# Altium PCB QR_Scanning_V1_STM32.PcbDoc (part 1 of 2)
Units mm, origin at the board's own origin, x right, y up, seen from the top; angles counter-clockwise.
Board outline 129.98 x 102.14 mm, 2 copper layers (Top Layer, Bottom Layer); 184 components, 126 nets, 555 pads, 211 vias.
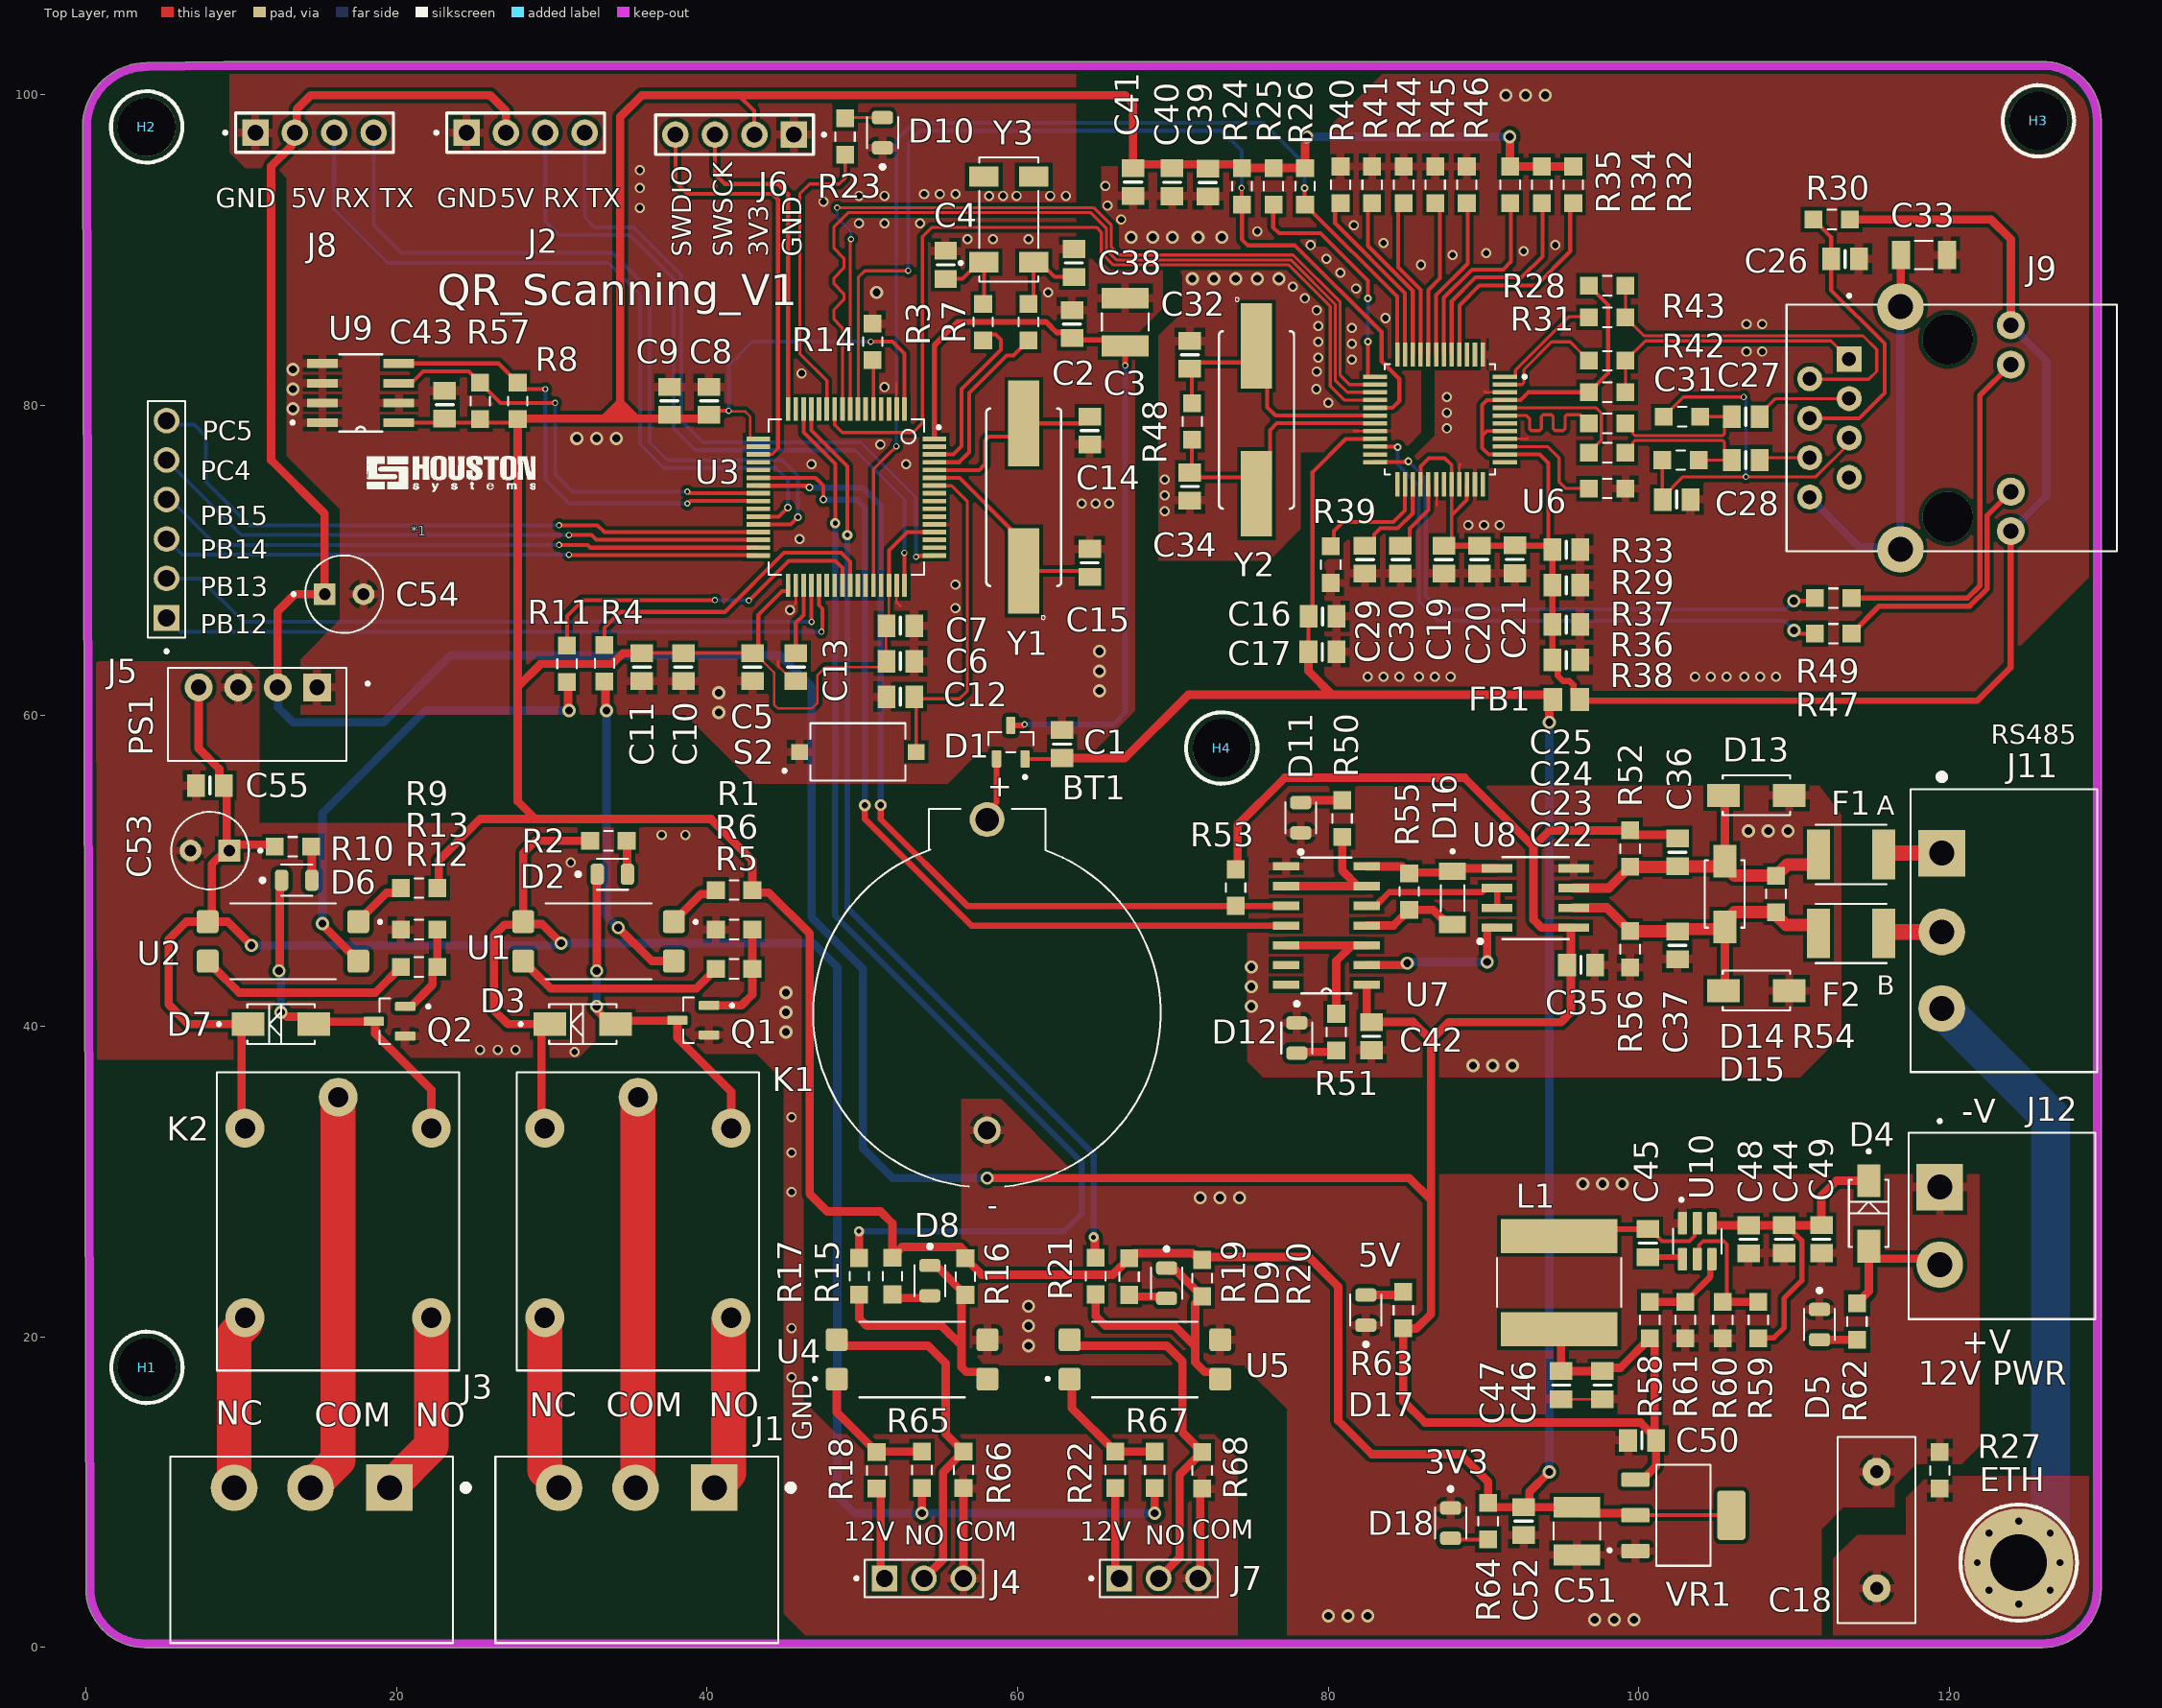
[diagram p0: Top Layer view]
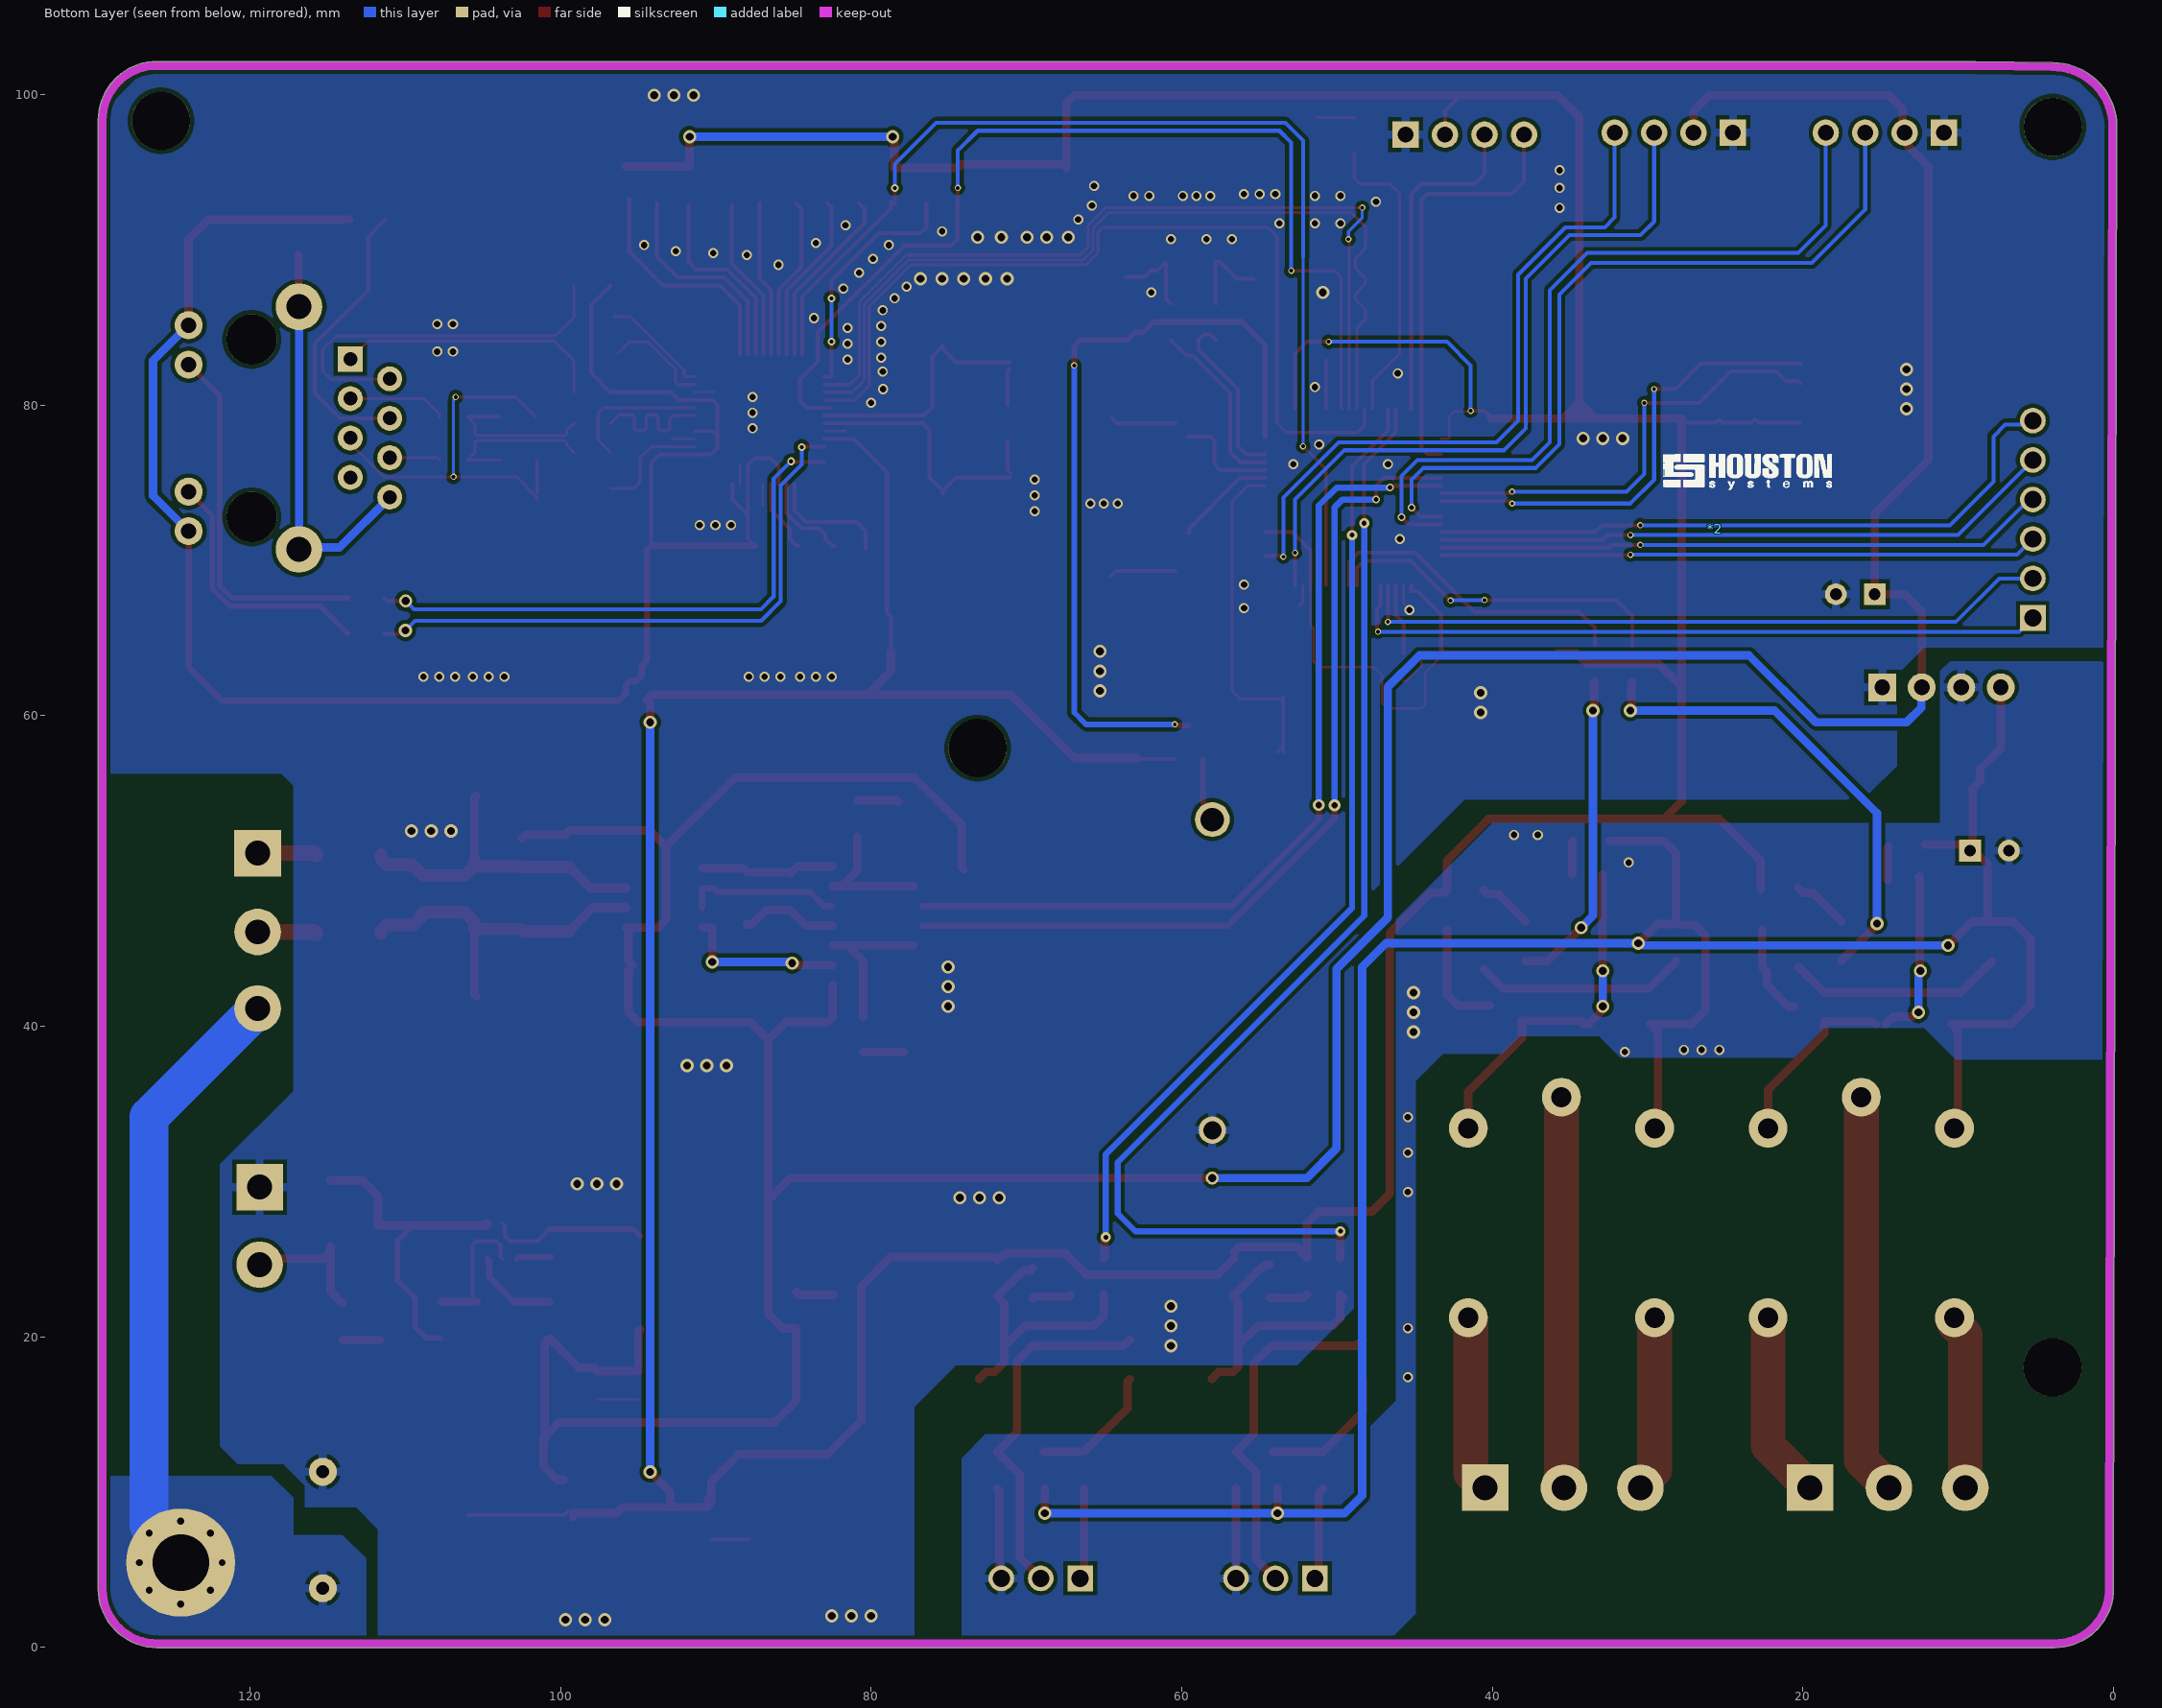
[diagram p1: Bottom Layer view, seen from below]
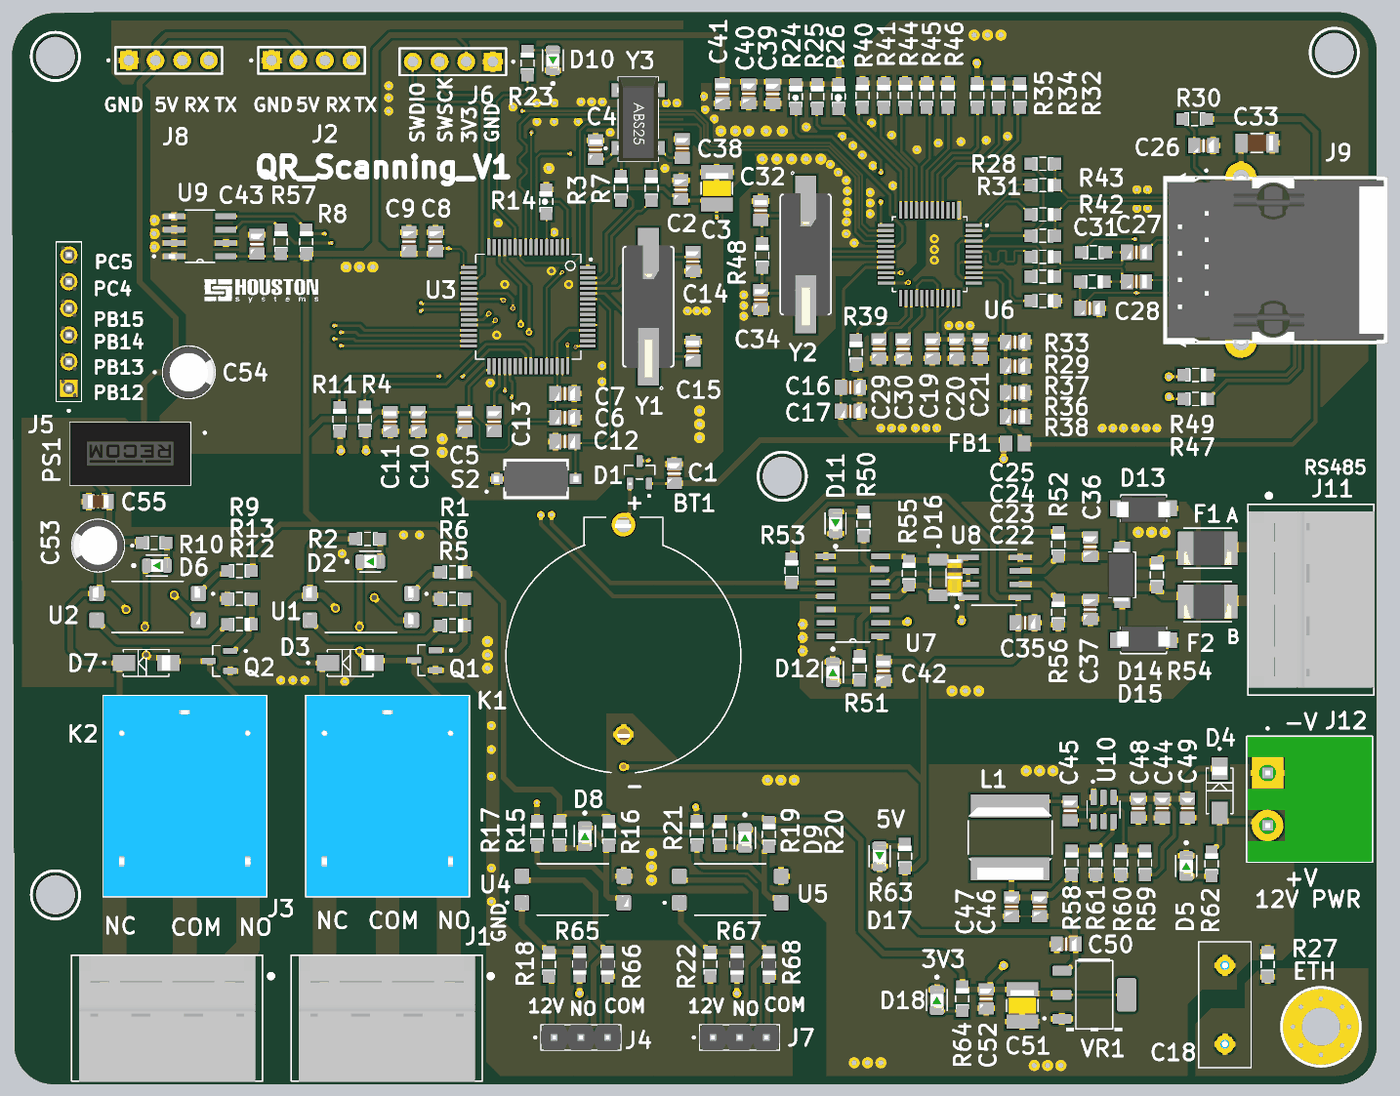
[diagram p3: 3D render of the assembled board from above, using the file's embedded part models]

## Layer stack, top to bottom
Top Solder: solder mask 0.0102, Solder Resist, Dk 3.5
Top Layer: signal copper 0.0356
Dielectric 1: dielectric 0.32, FR-4, Dk 4.8
Bottom Layer: signal copper 0.0356
Bottom Solder: solder mask 0.0102, Solder Resist, Dk 3.5

## Board outline
125.998,-0.016 ccw(c125.984,3.775) 129.776,3.775 129.776,98.333 ccw(c125.984,98.333) 125.984,102.124 125.982,102.124 8.89,102.124 8.885,102.124 3.926,102.041 ccw(c3.928,97.909) -0.203,97.909 0.018,5.299 0.018,3.776 ccw(c3.81,3.776) 3.81,-0.016

## Design rules (kind name [scope] priority, off if disabled: settings)
Clearance Clearance_1 [All] p1: gap=0.254 ignorepadtopadclearanceinfootprint=FALSE except(0.125: Arc-Arc Arc-Track Arc-SMDPad Track-Track Track-SMDPad; 0.154: SMDPad-SMDPad)
DiffPairsRouting [All] p1: maxlimit=0.127 minlimit=0.127 mostfreqgap=0.127 toplayer_minwidth=0.197 toplayer_maxwidth=0.197 toplayer_prefwidth=0.197 bottomlayer_minwidth=0.197 bottomlayer_maxwidth=0.197 bottomlayer_prefwidth=0.197 impedanceprofiledriven=TRUE impedanceprofileid={E7BAE55F-32ED-4D8B-B3F7-4CC335C5E980} impedanceprofilevalue=100.000000 maxuncoupledlength=12.7
HoleSize [All] p1: absolutevalues=TRUE maxlimit=5.54 minlimit=0.025 maxpercent=80.000 minpercent=20.000
HoleToHoleClearance [All] p1: gap=0.025 allowstackedmicrovias=TRUE
MinimumSolderMaskSliver [All] p1: minsoldermaskwidth=0.002
PlaneConnect [All] p1: planeconnectstyle=Relief reliefexpansion=0.508 reliefentries=4 reliefconductorwidth=0.54 reliefairgap=0.254
PolygonConnect [All] p1: connectstyle=Relief reliefconductorwidth=0.54 reliefentries=4 polygonreliefangle="90 Angle" airgapwidth=0.254
RoutingVias [All] p1: holewidth=0.411 width=0.7 viastyle="Through Hole" minholewidth=0.111 minwidth=0.15 maxholewidth=0.511 maxwidth=0.85
SilkToSilkClearance [All] p1: silktosilkclearance=0.1
SilkToSolderMaskClearance [IsPad] p1: minsilkscreentomaskgap=-0.5 clearancetoexposedcopper=TRUE
SolderMaskExpansion [All] p1: expansion=0.102 istentingtop=FALSE
SupplyNets "Schematic Supply Nets_9" [InNet('5VDC')] p1: voltage=0.000
SupplyNets "Schematic Supply Nets_3" [InNet('ERTH')] p2: voltage=0.000
SupplyNets "Schematic Supply Nets_8" [InNet('12VCC')] p3: voltage=0.000
SupplyNets "Schematic Supply Nets_7" [InNet('+12')] p4: voltage=0.000
SupplyNets "Schematic Supply Nets_6" [InNet('3V3')] p5: voltage=0.000
SupplyNets "Schematic Supply Nets_5" [InNet('SGND')] p6: voltage=0.000
SupplyNets "Schematic Supply Nets_4" [InNet('GND_ERTH')] p7: voltage=0.000
SupplyNets "Schematic Supply Nets_2" [InNet('AVDD')] p8: voltage=0.000
SupplyNets "Schematic Supply Nets_1" [InNet('GND')] p9: voltage=0.000
SupplyNets "Schematic Supply Nets" [InNet('+5')] p10: voltage=0.000
Width Width_1 [All] p1: maxlimit=2.5 minlimit=0.154 preferedwidth=0.54
Width [InNetClass('All Nets')] p2: maxlimit=0.535 minlimit=0.535 preferedwidth=0.535 impedanceprofiledriven=TRUE impedanceprofileid={4CF58DFD-B6A9-4837-9F42-7D02EB7506FA} impedanceprofilevalue=50.000000 minimp=50.000000 maximp=50.000000 favimp=50.000000
23 further rules are at their usual default settings.

## Classes and differential pairs
component class QR_Scanning2_V1_STM32: C44 C45 C46 C47 C48 C49 C50 C51 C52 C53 C54 C55 D4 D5 D17 D18 J12 L1 PS1 R58 R59 R60 R61 R62 R63 R64 U10 VR1
differential pair class DIFF_100: RJ45 RX TX
net class "Single_50 ohm": INT MISO MOSI OSC_IN OSC_OUT RST SCS SWO/sck1 XI XO
component class QR_Scanning_V1_STM32: BT1 C1 C2 C3 C4 C5 C6 C7 C8 C9 C10 C11 C12 C13 C14 C15 C38 C43 D1 D2 D3 D6 D7 D8 D9 D10 J1 J2 J3 J4 J5 J6 J7 J8 K1 K2 Q1 Q2 R1 R2 R3 R4 R5 R6 R7 R8 R9 R10 R11 R12 R13 R14 R15 R16 R17 R18 R19 R20 R21 R22 R23 R57 R65 R66 R67 R68 S2 U1 U2 U3 U4 U5 U9 Y1 Y3
component class QR_Scanning1_V1_STM32: *1 C16 C17 C18 C19 C20 C21 C22 C23 C24 C25 C26 C27 C28 C29 C30 C31 C32 C33 C34 C35 C36 C37 C39 C40 C41 C42 D11 D12 D13 D14 D15 D16 E ETH F1 F2 FB1 H1 H2 H3 H4 J9 J11 R24 R25 R26 R27 R28 R29 R30 R31 R32 R33 R34 R35 R36 R37 R38 R39 R40 R41 R42 R43 R44 R45 R46 R47 R48 R49 R50 R51 R52 R53 R54 R55 R56 U6 U7 U8 Y2
differential pair TX: +TX_P -TX_N
differential pair RX: +RX_P -RX_N
differential pair RJ45: +RJ45_P -RJ45_N

## Components (designator, comment, footprint, x,y, rotation, side; value= is the part's Value field where it differs from the comment)
*1 "HOUSTON_LOGO" HOUSTON_LOGO 21.463,71.882 r0 top
*2 "HOUSTON_LOGO" HOUSTON_LOGO 25.654,72.009 r180 bottom (schematic designator *1)
BT1 "Battery Holder (Open) Coin" "Battery Holder (Open) Coin" 58.039,43.307 r90 top
C1 "CAP 0.1uF 50V 0805" "CAP CER 0.1uF/50V 5%" 62.865,58.166 r270 top
C2 "CAP 0.1uF 50V 0805" "CAP CER 0.1uF/50V 5%" 63.5,85.217 r270 top
C3 "TANT CAP 10uF/16V 5% 3528(B)" "TANT CAP 3528(B)" 66.929,85.344 r90 top
C4 "CAP 4.3pF 50V 0805" "CAP CER 0.1uF/50V 5%" 55.372,89.027 r90 top
C5 "CAP 0.1uF 50V 0805" "CAP CER 0.1uF/50V 5%" 42.926,63.13 r90 top
C6 "CAP 0.1uF 50V 0805" "CAP CER 0.1uF/50V 5%" 52.451,63.5 r180 top
C7 "CAP 0.1uF 50V 0805" "CAP CER 0.1uF/50V 5%" 52.451,65.786 r180 top
C8 "CAP 0.1uF 50V 0805" "CAP CER 0.1uF/50V 5%" 40.132,80.264 r270 top
C9 "CAP 0.1uF 50V 0805" "CAP CER 0.1uF/50V 5%" 37.592,80.264 r270 top
C10 "CAP 0.1uF 50V 0805" "CAP CER 0.1uF/50V 5%" 38.481,63.119 r90 top
C11 "CAP 4.7uF 50V 0805" "CAP CER 0.1uF/50V 5%" 35.814,63.119 r90 top
C12 "CAP 0.1uF 50V 0805" "CAP CER 0.1uF/50V 5%" 52.451,61.214 r0 top
C13 "CAP 4.7uF 50V 0805" "CAP CER 0.1uF/50V 5%" 45.72,63.119 r90 top
C14 "CAP 20pF 50V 0805" "CAP CER 0.1uF/50V 5%" 64.643,78.359 r270 top
C15 "CAP 20pF 50V 0805" "CAP CER 0.1uF/50V 5%" 64.643,69.839 r90 top
C16 "CAP 0.1uF 50V 0805" "CAP CER 0.1uF/50V 5%" 79.643,66.396 r180 top
C17 "CAP 10uF 50V 0805" "CAP CER 0.1uF/50V 5%" 79.629,64.11 r180 top
C18 "Ceramic capacitor 3300pF4KV" "Ceramic capacitor 3300pF4KV" 115.316,7.56 r270 top
C19 "CAP 0.1uF 50V 0805" "CAP CER 0.1uF/50V 5%" 87.452,70.042 r90 top
C20 "CAP 0.1uF 50V 0805" "CAP CER 0.1uF/50V 5%" 89.738,70.042 r90 top
C21 "CAP 0.1uF 50V 0805" "CAP CER 0.1uF/50V 5%" 92.024,70.064 r90 top
C22 "CAP 0.1uF 50V 0805" "CAP CER 0.1uF/50V 5%" 95.326,63.576 r180 top
C23 "CAP 0.1uF 50V 0805" "CAP CER 0.1uF/50V 5%" 95.326,65.862 r180 top
C24 "CAP 0.1uF 50V 0805" "CAP CER 0.1uF/50V 5%" 95.326,68.402 r180 top
C25 "CAP 10uF 50V 0805" "CAP CER 0.1uF/50V 5%" 95.326,70.688 r180 top
C26 "CAP 22nF 50V 0805" "CAP CER 0.1uF/50V 5%" 113.284,89.408 r180 top
C27 "CAP 6.8nF 50V 0805" "CAP CER 0.1uF/50V 5%" 106.894,79.248 r180 top
C28 "CAP 6.8nF 50V 0805" "CAP CER 0.1uF/50V 5%" 106.894,76.454 r180 top
C29 "CAP 10nF 50V 0805" "CAP CER 0.1uF/50V 5%" 82.372,70.042 r90 top
C30 "CAP 4.7uF 50V 0805" "CAP CER 0.1uF/50V 5%" 84.658,70.042 r90 top
C31 "CAP 10nF 50V 0805" "CAP CER 0.1uF/50V 5%" 102.438,73.914 r180 top
C32 "CAP 18pF 50V 0805" "CAP CER 0.1uF/50V 5%" 71.095,83.236 r90 top
C33 "CAP CER 1nF/2KV 1206 5%" "CAP CER 1nF/2KV 1206 5%" 118.364,89.662 r180 top
C34 "CAP 18pF 50V 0805" "CAP CER 0.1uF/50V 5%" 71.095,74.752 r270 top
C35 "CAP 0.1uF 50V 0805" "CAP CER 0.1uF/50V 5%" 96.277,43.942 r0 top
C36 "CAP 1nF 50V 0805" "CAP CER 0.1uF/50V 5%" 102.489,51.192 r90 top
C37 "CAP 1nF 50V 0805" "CAP CER 0.1uF/50V 5%" 102.489,45.212 r270 top
C38 "CAP 4.3pF 50V 0805" "CAP CER 0.1uF/50V 5%" 63.627,89.143 r90 top
C39 "CAP 0.1uF 50V 0805" "CAP CER 0.1uF/50V 5%" 72.253,94.328 r90 top
C40 "CAP 0.1uF 50V 0805" "CAP CER 0.1uF/50V 5%" 69.952,94.347 r90 top
C41 "CAP 0.1uF 50V 0805" "CAP CER 0.1uF/50V 5%" 67.437,94.361 r90 top
C42 "CAP 0.1uF 50V 0805" "CAP CER 0.1uF/50V 5%" 82.779,39.356 r90 top
C43 "CAP 0.1uF 50V 0805" "CAP CER 0.1uF/50V 5%" 23.114,80.021 r270 top
C44 "CAP 10uF 50V 0805" "CAP CER 0.1uF/50V 5%" 109.347,26.289 r90 top
C45 "CAP 0.1uF 50V 0805" "CAP CER 0.1uF/50V 5%" 100.584,26.035 r90 top
C46 "CAP 22uF 50V 0805" "CAP CER 0.1uF/50V 5%" 97.663,16.891 r90 top
C47 "CAP 22uF 50V 0805" "CAP CER 0.1uF/50V 5%" 94.996,16.891 r90 top
C48 "CAP 0.1uF 50V 0805" "CAP CER 0.1uF/50V 5%" 107.061,26.278 r90 top
C49 "CAP 10uF 50V 0805" "CAP CER 0.1uF/50V 5%" 111.76,26.289 r90 top
C50 "CAP 10uF 50V 0805" "CAP CER 0.1uF/50V 5%" 100.203,13.335 r0 top
C51 "TANT CAP 10uF/16V 5% 3528(B)" "TANT CAP 3528(B)" 96.012,7.493 r270 top
C52 "CAP 0.1uF 50V 0805" "CAP CER 0.1uF/50V 5%" 92.583,8.128 r90 top
C53 "CAP ELE 10µF 25V TH" "CAP ELE 10µF 25V TH" 8.001,51.308 r180 top
C54 "CAP ELE 10µF 25V TH" "CAP ELE 10µF 25V TH" 16.637,67.818 r0 top
C55 "CAP 0.1uF 50V 0805" "CAP CER 0.1uF/50V 5%" 8.001,55.499 r0 top
D1 "Schottky Diode SOT23" "Schottky Diode SOT23 BAT54C" 59.563,58.293 r90 top
D2 "LED-0805" LED-0805 33.909,49.784 r0 top
D3 "DIODE M7 DO-214AC" "DIODE M7 DO-214AC" 32.004,40.132 r0 top
D4 "DIODE M7 DO-214AC" "DIODE M7 DO-214AC" 114.808,27.94 r270 top
D5 "LED-0805" LED-0805 111.633,20.787 r270 top
D6 "LED-0805" LED-0805 13.589,49.403 r0 top
D7 "DIODE M7 DO-214AC" "DIODE M7 DO-214AC" 12.573,40.132 r0 top
D8 "LED-0805" LED-0805 54.356,23.622 r270 top
D9 "LED-0805" LED-0805 69.596,23.454 r270 top
D10 "LED-0805" LED-0805 51.308,97.536 r90 top
D11 "LED-0805" LED-0805 78.232,53.426 r90 top
D12 "LED-0805" LED-0805 77.978,39.243 r270 top
D13 "TVS SMAJ6.0CA BiD" "TVS SMAJ6.0CA DO-214AC (SMA)" 107.569,54.864 r0 top
D14 "TVS SMAJ6.0CA BiD" "TVS SMAJ6.0CA DO-214AC (SMA)" 105.537,48.514 r90 top
D15 "TVS SMAJ6.0CA BiD" "TVS SMAJ6.0CA DO-214AC (SMA)" 107.569,42.291 r180 top
D16 "DIODE-1N4148W-SOD-80" DIODE-1N4148W-SOD-80 88.011,48.26 r270 top
D17 "LED-0805" LED-0805 82.423,21.717 r90 top
D18 "LED-0805" LED-0805 87.884,8.001 r270 top
ETH "EARTHING_VIA HOLE_3.65MM" "EARTHING_VIA HOLE_3.65MM" 124.46,5.461 r90 top (schematic designator "EARTHING_VIA HOLE_3.65MM")
F1 "FUSE 1812" "FUSE 1812" 113.665,51.054 r0 top
F2 "FUSE 1812" "FUSE 1812" 113.665,45.974 r0 top
FB1 "FB 0805" "FB 0805" 95.326,61.036 r0 top
H1 "ScrewHole_3.75mmD" "ScrewHole_3.75mmD - duplicate" 3.937,18.034 r180 top
H2 "ScrewHole_3.75mmD" "ScrewHole_3.75mmD - duplicate" 3.928,97.909 r180 top
H3 "ScrewHole_3.75mmD" "ScrewHole_3.75mmD - duplicate" 125.73,98.298 r180 top
H4 "ScrewHole_3.75mmD" "ScrewHole_3.75mmD - duplicate" 73.152,57.912 r180 top
J1 "3 Pin Terminal Block 5MM RA" "3 Pin Terminal Block 5MM RA" 35.48,10.287 r180 top
J2 "BURGE 4 PIN 2.54mm" "BURGE 4 PIN 2.54mm" 28.321,97.536 r0 top
J3 "3 Pin Terminal Block 5MM RA" "3 Pin Terminal Block 5MM RA" 14.558,10.287 r180 top
J4 "3_pin brg" "3_pin brg" 53.975,4.445 r0 top
J5 "BERGE 6 PIN 2.54mm" "BERGE 6 PIN 2.54mm" 5.207,72.644 r90 top
J6 "BURGE 4 PIN 2.54mm" "BURGE 4 PIN 2.54mm" 41.783,97.409 r180 top
J7 "3_pin brg" "3_pin brg" 69.088,4.445 r0 top
J8 "BURGE 4 PIN 2.54mm" "BURGE 4 PIN 2.54mm" 14.732,97.536 r0 top
J9 "RJ45 8P8C" "RJ45 8P8C" 119.892,78.512 r270 top
J11 "3 Pin Terminal Block 5MM RA" "3 Pin Terminal Block 5MM RA" 119.507,46.148 r270 top
J12 "2 Pin Terminal Block 5MM RA" "2 Pin Terminal Block 5MM RA" 119.38,29.638 r270 top
K1 "Relay_5Pin SPDT THT" "Relay_5Pin SPDT THT" 35.56,27.432 r270 top
K2 "Relay_5Pin SPDT THT" "Relay_5Pin SPDT THT" 16.256,27.432 r270 top
L1 "INDUCTOR 8040S SWPA8040S120MT" "INDUCTOR 8040S SWPA8040S120MT" 94.869,23.495 r270 top
PS1 "RFM-0505S SIP4" RFM-0505S 11.049,60.071 r180 top
Q1 "NPN SOT-23 SMT BC848C_RFG" "NPN SOT-23 SMT BC848C_RFG" 39.116,40.386 r180 top
Q2 "NPN SOT-23 SMT BC848C_RFG" "NPN SOT-23 SMT BC848C_RFG" 19.559,40.32 r180 top
R1 "RES 470R 0.25W 5% 0805" "RES 0805 10K/0.25W 5%" 41.751,48.768 r0 top
R2 "RES 470R 0.25W 5% 0805" "RES 0805 10K/0.25W 5%" 33.655,51.943 r180 top
R3 "RES 0E 0.25W 5% 0805" "RES 0805 10K/0.25W 5%" 57.785,85.344 r90 top
R4 "RES 0E 0.25W 5% 0805" "RES 0805 10K/0.25W 5%" 33.401,63.373 r90 top
R5 "RES 470R 0.25W 5% 0805" "RES 0805 10K/0.25W 5%" 41.751,43.688 r0 top
R6 "RES 10K 0.25W 5% 0805" "RES 0805 10K/0.25W 5%" 41.751,46.228 r0 top
R7 "RES 0E 0.25W 5% 0805" "RES 0805 10K/0.25W 5%" 60.706,85.344 r90 top
R8 "RES 4.7K 0.25W 5% 0805" "RES 0805 10K/0.25W 5%" 27.813,80.264 r270 top
R9 "RES 470R 0.25W 5% 0805" "RES 0805 10K/0.25W 5%" 21.463,48.895 r0 top
R10 "RES 470R 0.25W 5% 0805" "RES 0805 10K/0.25W 5%" 13.335,51.562 r180 top
R11 "RES 0E 0.25W 5% 0805" "RES 0805 10K/0.25W 5%" 30.988,63.341 r90 top
R12 "RES 470R 0.25W 5% 0805" "RES 0805 10K/0.25W 5%" 21.463,43.815 r0 top
R13 "RES 10K 0.25W 5% 0805" "RES 0805 10K/0.25W 5%" 21.463,46.228 r0 top
R14 "RES 10K 0.25W 5% 0805" "RES 0805 10K/0.25W 5%" 50.673,84.074 r270 top
R15 "RES 330R 0.25W 5% 0805" "RES 0805 10K/0.25W 5%" 51.943,23.908 r90 top
R16 "RES 5.1K 0.25W 5% 0805" "RES 0805 10K/0.25W 5%" 56.642,23.876 r270 top
R17 "RES 0E 0.25W 5% 0805" "RES 0805 10K/0.25W 5%" 49.807,23.899 r90 top
R18 "RES 1K 0.25W 5% 0805" "RES 0805 10K/0.25W 5%" 50.927,11.398 r90 top
R19 "RES 330R 0.25W 5% 0805" "RES 0805 10K/0.25W 5%" 67.183,23.876 r90 top
R20 "RES 5.1K 0.25W 5% 0805" "RES 0805 10K/0.25W 5%" 71.882,23.781 r270 top
R21 "RES 0E 0.25W 5% 0805" "RES 0805 10K/0.25W 5%" 65.024,23.908 r90 top
R22 "RES 1K 0.25W 5% 0805" "RES 0805 10K/0.25W 5%" 66.294,11.43 r90 top
R23 "RES 330R 0.25W 5% 0805" "RES 0805 10K/0.25W 5%" 48.895,97.282 r270 top
R24 "RES 10K 0.25W 5% 0805" "RES 0805 10K/0.25W 5%" 74.447,94.088 r90 top
R25 "RES 10K 0.25W 5% 0805" "RES 0805 10K/0.25W 5%" 76.479,94.088 r90 top
R26 "RES 10K 0.25W 5% 0805" "RES 0805 10K/0.25W 5%" 78.511,94.088 r90 top
R27 "RES 1M 0.25W 5% 0805" "RES 0805 10K/0.25W 5%" 119.38,11.398 r270 top
R28 "RES 49E9 0.25W 1% 0805" "RES 0805 10K/0.25W 5%" 97.968,87.681 r180 top
R29 "RES 49E9 0.25W 1% 0805" "RES 0805 10K/0.25W 5%" 97.968,80.823 r180 top
R30 "RES 10E 0.25W 5% 0805" "RES 0805 10K/0.25W 5%" 112.427,91.948 r0 top
R31 "RES 0E 0.25W 5% 0805" "RES 0805 10K/0.25W 5%" 97.968,85.649 r180 top
R32 "RES 10K 0.25W 5% 0805" "RES 0805 10K/0.25W 5%" 95.783,94.183 r90 top
R33 "RES 0E 0.25W 5% 0805" "RES 0805 10K/0.25W 5%" 97.968,82.855 r180 top
R34 "RES 10K 0.25W 5% 0805" "RES 0805 10K/0.25W 5%" 93.751,94.183 r90 top
R35 "RES 10K 0.25W 5% 0805" "RES 0805 10K/0.25W 5%" 91.719,94.183 r90 top
R36 "RES 0E 0.25W 5% 0805" "RES 0805 10K/0.25W 5%" 97.968,76.937 r180 top
R37 "RES 0E 0.25W 5% 0805" "RES 0805 10K/0.25W 5%" 97.968,78.816 r180 top
R38 "RES 12.4K 0.25W 5% 0805" "RES 0805 10K/0.25W 5%" 97.968,74.625 r180 top
R39 "RES 10K 0.25W 5% 0805" "RES 0805 10K/0.25W 5%" 80.162,69.723 r270 top
R40 "RES 10K 0.25W 5% 0805" "RES 0805 10K/0.25W 5%" 80.797,94.183 r90 top
R41 "RES 10K 0.25W 5% 0805" "RES 0805 10K/0.25W 5%" 82.829,94.183 r90 top
R42 "RES 49E9 0.25W 1% 0805" "RES 0805 10K/0.25W 5%" 102.692,76.454 r0 top
R43 "RES 49E9 0.25W 1% 0805" "RES 0805 10K/0.25W 5%" 102.787,79.248 r0 top
R44 "RES 10K 0.25W 5% 0805" "RES 0805 10K/0.25W 5%" 84.861,94.183 r90 top
R45 "RES 10K 0.25W 5% 0805" "RES 0805 10K/0.25W 5%" 86.893,94.183 r90 top
R46 "RES 10K 0.25W 5% 0805" "RES 0805 10K/0.25W 5%" 88.925,94.183 r90 top
R47 "RES 330E 0.25W 5% 0805" "RES 0805 10K/0.25W 5%" 112.522,65.278 r0 top
R48 "RES 1M 0.25W 5% 0805" "RES 0805 10K/0.25W 5%" 71.247,78.943 r90 top
R49 "RES 330E 0.25W 5% 0805" "RES 0805 10K/0.25W 5%" 112.522,67.564 r0 top
R50 "RES 330R 0.25W 5% 0805" "RES 0805 10K/0.25W 5%" 80.899,53.372 r270 top
R51 "RES 330R 0.25W 5% 0805" "RES 0805 10K/0.25W 5%" 80.518,39.624 r90 top
R52 "RES 1K 0.25W 5% 0805" "RES 0805 10K/0.25W 5%" 99.441,51.435 r270 top
R53 "RES 10K 0.25W 5% 0805" "RES 0805 10K/0.25W 5%" 74.041,48.927 r90 top
R54 "RES120E 0.25W 5% 0805" "RES 0805 10K/0.25W 5%" 108.839,48.514 r90 top
R55 "RES 1K 0.25W 5% 0805" "RES 0805 10K/0.25W 5%" 85.217,48.673 r90 top
R56 "RES 1K 0.25W 5% 0805" "RES 0805 10K/0.25W 5%" 99.441,44.958 r90 top
R57 "RES 4.7K 0.25W 5% 0805" "RES 0805 10K/0.25W 5%" 25.4,80.264 r270 top
R58 "RES 75K 0.25W 5% 0805" "RES 0805 10K/0.25W 5%" 100.711,21.082 r270 top
R59 "RES 15K 0.25W 5% 0805" "RES 0805 10K/0.25W 5%" 107.696,21.082 r90 top
R60 "RES 10K 0.25W 5% 0805" "RES 0805 10K/0.25W 5%" 105.41,21.082 r90 top
R61 "RES 10K 0.25W 5% 0805" "RES 0805 10K/0.25W 5%" 102.997,21.082 r90 top
R62 "RES 1K 0.25W 5% 0805" "RES 0805 10K/0.25W 5%" 114.046,20.987 r90 top
R63 "RES 470R 0.25W 5% 0805" "RES 0805 10K/0.25W 5%" 84.836,21.717 r270 top
R64 "RES 220R 0.25W 5% 0805" "RES 0805 10K/0.25W 5%" 90.297,8.128 r90 top
R65 "RES 15K 0.25W 5% 0805" "RES 0805 10K/0.25W 5%" 53.848,11.43 r90 top
R66 "RES 0E 0.25W 5% 0805" "RES 0805 10K/0.25W 5%" 56.515,11.43 r90 top
R67 "RES 15K 0.25W 5% 0805" "RES 0805 10K/0.25W 5%" 68.834,11.43 r90 top
R68 "RES 0E 0.25W 5% 0805" "RES 0805 10K/0.25W 5%" 71.882,11.398 r90 top
S2 "PUSHBUTTON_SMD_6.1 x 3.7 mm, 2.5 mm" "PUSHBUTTON_SMD_6.1 x 3.7 mm, 2.5 mm" 49.717,57.658 r0 top
U1 "OPTOCPLR EL817S1-FV" "OPTOCPLR EL817S1-FV" 33.02,45.466 r180 top
U2 "OPTOCPLR EL817S1-FV" "OPTOCPLR EL817S1-FV" 12.7,45.466 r180 top
U3 "STM32F401RET6 LQFP-64" "STM32F401RE Cortex-M4" 48.971,74.066 r180 top
U4 "OPTOCPLR EL817S1-FV" "OPTOCPLR EL817S1-FV" 53.213,18.542 r0 top
U5 "OPTOCPLR EL817S1-FV" "OPTOCPLR EL817S1-FV" 68.199,18.542 r0 top
U6 "W5500 LQFP-48" "W5500 LQFP-48" 87.198,79.07 r180 top
U7 "74HC14D SOIC-14" "74HC14D SOIC-14" 79.883,46.482 r0 top
U8 "MAX485CSA SOIC-8" MAX485CSA 93.345,48.26 r0 top
U9 "EEPROM AT24C512C SOIC-8" "EEPROM AT24C512C SOIC-8" 17.704,80.772 r0 top
U10 "TPS54202DDCT" TPS54202DDCT 103.759,26.162 r270 top
VR1 "LM1117IMPX-3.3V SOT-223" "LM1117IMPX-3.3V SOT-223" 102.87,8.509 r0 top
Y1 "Crystal 8 Mhz SMD 2 pin" "Crystal 16 Mhz SMD 2 pin" 60.401,74.066 r90 top
Y2 "Crystal 25 Mhz SMD 2 pin" "Crystal 16 Mhz SMD 2 pin" 75.387,79.045 r270 top
Y3 "Crystal-32.768KHZ" Crystal-32.768KHZ 59.436,91.948 r0 top

## Footprints (in the part's own frame and the unit in brackets; to place one, negate y for a bottom-side part, rotate by r counter-clockwise, add the part's x,y. Pads: shape width x height; smd on the part's side, far side on the other; paste and mask are expansions set on the pad)
"2 Pin Terminal Block 5MM RA" [mm] "2 Pin Terminal Block HDR 5MM THT RA_OQ0271510000G"
  rect 3x3 hole 1.6: 1(0,0)
  round 3 hole 1.6: 2(5,0)
  silkscreen extent -4.35,-2 8.5,10, body extent -3.5,-2 8.5,10, height 3.5
"3 Pin Terminal Block 5MM RA" [mm] "3 Pin Terminal Block HDR 5MM THT RA 231-433_001-000"
  rect 3x3 hole 1.6: 1(-5,0)
  round 3 hole 1.6: 2(0.08,0) 3(5,0)
  silkscreen extent -10.11,-2 9.1,10, body extent -8.42,-1.94 8.38,10.06, height 11.42
"3_pin brg" [mm] "3_pin brg 2.54mm"
  rect 1.65x1.65 / inner round 1.65 / far side rect 1.65x1.65 hole 1.1: 1(-2.54,0)
  round 1.65 hole 1.1: 2(0,0) 3(2.54,0)
  silkscreen extent -4.45,-1.2 3.81,1.2, body extent -3.81,-1.2 3.81,1.2, height 8.38
"74HC14D SOIC-14" [mil] "Inverter IC 6 Channel Schmitt Trigger 14-SO/SOIC-14"
  rect 67x21 smd: 1(-102,-150) 2(-102,-100) 3(-102,-50) 4(-102,0) 5(-102,50) 6(-102,100) 7(-102,150) 8(102,150) 9(102,100) 10(102,50) 11(102,0) 12(102,-50) 13(102,-100) 14(102,-150)
  silkscreen extent -63,-172 63,172, body extent -118,-170 118,170
"Battery Holder (Open) Coin" [mm] "Battery Holder (Open) Coin"
  round 1.755 hole 1.17: NEG(-10,0)
  round 2.25 hole 1.5: POS(10,0)
  silkscreen extent -13.63,-11.17 10.7,11.2, body extent -13.84,-11.05 10.54,11.3, height 2.84
"BERGE 6 PIN 2.54mm" [mm] "BERGE 6 PIN 2.54mm, AMPHENOL_68604-406HLF"
  rect 1.65x1.65 / inner round 1.65 / far side rect 1.65x1.65 hole 1.1: 1(-6.35,0)
  round 1.65 hole 1.1: 2(-3.81,0) 3(-1.27,0) 4(1.27,0) 5(3.81,0) 6(6.35,0)
  silkscreen extent -8.6,-1.2 7.62,1.2, body extent -7.62,-1.2 7.62,1.2, height 3.05
"BURGE 4 PIN 2.54mm" [mm] "BURGE 4 PIN 2.54mm TSW-104-X-X-S-LL"
  rect 1.7x1.7 hole 1.02: 01(-3.81,0)
  round 1.7 hole 1.02: 02(-1.27,0) 03(1.27,0) 04(3.81,0)
  silkscreen extent -5.85,-1.27 5.08,1.27
"CAP CER 0.1uF/50V 5%" [mm] "CAP CER 0.1uF/50V  Ceramic Capacitor X7R 0805 (2012 Metric) SMT"
  rect 1.15x1.45 smd: 1(-0.9,0) 2(0.9,0)
  silkscreen extent 0,-0.55 0,0.55, body extent -1,-0.63 1,0.63
"CAP CER 1nF/2KV 1206 5%" [mm] "1000 pF Â±10% 2000V (2kV) Ceramic Capacitor X7R 1206 (3216 Metric) C1206C102KGRACAUTO"
  rect 1.16x1.82 smd: 1(-1.475,0) 2(1.475,0)
  silkscreen extent -0.57,-0.9 0.57,0.9, body extent -1.6,-0.8 1.6,0.8
"CAP ELE 10µF 25V TH" [mm] "10µF 25V Aluminum Electrolytic Capacitors Radial Lead Type THT, Dia-5mm, Pitch-2mm ECEA1EN100UI"
  round 1.4 hole 0.75: N(1.25,0)
  rect 1.4x1.4 hole 0.75: P(-1.25,0)
  silkscreen extent -3.35,-2.5 2.5,2.5, body extent -2.5,-2.5 2.5,2.5, height 11
"Ceramic capacitor 3300pF4KV" [mm] "Ceramic capacitor 3300pF4KV, Tension nominale 400Vac(r.m.s.), 4KV ESD, DE2E3SA332MA3BY02F"
  round 1.8 hole 0.85: 1(-3.75,0) 2(3.75,0)
  silkscreen extent -6,-2.5 6,2.5, body extent -6,-2.5 6,2.5, height 25
"Crystal 16 Mhz SMD 2 pin" [mm] "16 MHz Â±30ppm Crystal 20pF 60 Ohms HC-49/US FOXSDLF/128-20 16 Mhz Crystal SMD –CSM-4ALX(28ALX) SMT12.5mmX4.85mmX4mm"
  rect 5.5x2 smd: 1(-4.75,0) 2(4.75,0)
  silkscreen extent -7.88,-2.41 5.71,2.41, body extent -6.75,-2.5 6.75,2.5
Crystal-32.768KHZ [mm] "32.768 kHz Â±20ppm Crystal 6pF 50 kOhms 4-SOJ, 5.50mm pitch ABS25-32.768KHZ-6-T"
  rect 1.9x1.3 smd: 1(-1.6,-2.75) 2(-1.6,2.75) 3(1.6,2.75) 4(1.6,-2.75)
  silkscreen extent -3.2,-4 1.9,4, body extent -2,-4 2,4, height 2.72
"DIODE M7 DO-214AC" [mm] "M7 General Purpose SMD Rectifier Diode SMA (DO-214AC) 1A 1000V 1n4007  DIOM4325X250N"
  rect 2.12x1.5 smd: A(2.115,0) C(-2.115,0)
  silkscreen extent -4.1,-1.28 2.16,1.28, body extent -2.57,-1.28 2.57,1.28
DIODE-1N4148W-SOD-80 [mm] "DIODE-1N4148W-SOD-80 is a general-purpose silicon diode LL4148_L1G"
  rect 1.11x1.73 smd: A(1.705,0) C(-1.705,0)
  silkscreen extent -3.1,-0.75 0.83,0.75, body extent -1.75,0.77 1.75,2.36, height 1.57
"EARTHING_VIA HOLE_3.65MM" [mm] "EARTHING VIA HOLE 3.65MM"
  round 7 hole 3.65: 1(0,0)
  round 0.5 hole 0.45: 2(-2.667,0) 2(-1.778,-2.032) 2(-1.778,1.905) 2(0,2.667) 2(0,-2.667) 2(1.905,-2.032) 2(1.905,1.905) 2(2.667,0)
  silkscreen extent -3.75,-3.75 3.75,3.75
"EEPROM AT24C512C SOIC-8" [mil] "EEPROM Memory IC 512Kb (64K x 8) IÂ²C 400 kHz 900 ns SOIC-8 AT24C512C-SSHM-T"
  rect 78x22 smd: 1(-97,-75) 2(-97,-25) 3(-97,25) 4(-97,75) 5(97,75) 6(97,25) 7(97,-25) 8(97,-75)
  silkscreen extent -176,-98 54,98, body extent -118,-96 118,96
"FB 0805" [mm] "MH2029-101Y-Bourns Inc.-Ferrite Bead, 100 Ohms @ 100 MHz , Signal Line Ferrite Bead 0805 (2012 Metric) 2A 100mOhm"
  rect 1.2x1.47 smd: 1(-0.86,0) 2(0.86,0)
"FUSE 1812" [mm] "Polymeric PTC Resettable Fuse 60V 100 mA Ih Surface Mount 1812 (4532 Metric), Concave, MF-MSMF010-2"
  rect 1.5x3.2 smd: 1(-2.1,0) 2(2.1,0)
  silkscreen extent -2.27,-1.91 2.27,1.91, body extent -2.27,-1.62 2.27,1.62
HOUSTON_LOGO [mm]
  silkscreen extent -3.35,2.52 7.49,4.87
"INDUCTOR 8040S SWPA8040S120MT" [mm]
  rect 2.2x7.5 smd: 1(-3,0) 2(3,0)
  silkscreen extent -1.58,-4 1.58,4, body extent -4,-4 4,4
LED-0805 [mm] "Red 640nm LED Indication - Discrete 1.85V 0805 (2012 Metric) SMT APT2012SRCPRV"
  rrect50% 0.86x1.36 smd: A(0.975,0) C(-0.975,0)
  silkscreen extent -2.3,-0.99 1,0.99, body extent -1,-0.63 1,0.63
"LM1117IMPX-3.3V SOT-223" [mm] "LM1117IMPX-3.3V 800-mA 15-V linear voltage regulator SOT230P700X180-4N"
  rrect25% 1.84x0.93 smd: 1(-3.085,-2.3) 2(-3.085,0) 3(-3.085,2.3)
  rrect25% 1.84x3.19 smd: 4(3.085,0)
  silkscreen extent -4.85,-3.25 1.75,3.25, body extent -3.5,-3.25 3.5,3.25
MAX485CSA [mil] "MAX485CSA-RS-485/RS-422 Transceivers, SOIC-8"
  rect 78x21 smd: 1(-97,-75) 2(-97,-25) 3(-97,25) 4(-97,75) 5(97,75) 6(97,25) 7(97,-25) 8(97,-75)
  silkscreen extent -145,-115 84,104, body extent -118,-96 118,96
"NPN SOT-23 SMT BC848C_RFG" [mm] "NPN SOT-23 SMT BC848C_RFG SOT95P237X112-3N"
  rrect25% 1.32x0.59 smd: 1(-1.015,-0.95) 2(-1.015,0.95) 3(1.015,0)
  silkscreen extent -2.6,-1.46 0.65,1.46, body extent -1.19,-1.46 1.19,1.46
"OPTOCPLR EL817S1-FV" [mm] "OPTOCPLR EL817S1 SOIC254P1030X390-4N_EL817S1-FV"
  rrect25% 1.41x1.47 smd: 1(-4.85,-1.27) 2(-4.85,1.27) 3(4.85,1.27) 4(4.85,-1.27)
  silkscreen extent -6.35,-2.44 3.4,2.44, body extent -5.02,-2.29 5.28,2.29
"PUSHBUTTON_SMD_6.1 x 3.7 mm, 2.5 mm" [mm] "6.1 x 3.7 mm, 2.5 mm Actuator Height, 260 gf, Red, Surface Mount, SPST, Tactile Switch, TS09-63-25-R-260-SMT-TR"
  rect 1.1x1 smd: 1(-3.75,0) 2(3.75,0)
  silkscreen extent -4.82,-1.85 3.05,1.85, body extent -4.05,-1.85 4.05,1.85, height 0.05
"Relay_5Pin SPDT THT" [mm] "Relay_5Pin SPDT THT RELAY_SRD-03VDC-SL-C"
  round 2.5 hole 1.3: COIL1(-6,-6) COIL2(-6,6) COM(-8,0) NC(6.2,-6) NO(6.2,6)
  silkscreen extent -9.6,-7.8 9.6,7.8, body extent -9.6,-7.8 9.6,7.8, height 3
"RES 0805 10K/0.25W 5%" [mm] "RESISTOR, THICK FILM, 10K, 5%, 0805, SMT FULL REEL Product Range:PANASONIC - ERJ Series"
  rect 1.15x1.15 smd: 1(-1.175,0) 2(1.175,0)
  silkscreen extent -0.28,-0.63 0.28,0.63, body extent -1,-0.63 1,0.63
RFM-0505S [mm] "DC-DC Converter/Isolator, SIP4, THT S/T 1kV unreg, Single Output, 1W, 5V Out, RFM Series RFM-0505S"
  rect 1.8x1.8 hole 1: 1(-3.85,-1.75)
  round 1.8 hole 1: 2(-1.31,-1.75) 3(1.23,-1.75) 4(3.77,-1.75)
  silkscreen extent -7.21,-3 5.75,3, body extent -5.75,-3 5.75,3, height 9.5
"RJ45 8P8C" [mm] "RJ45 8P8C CUI_CRJ011-ML1-TH"
  round 1.808 hole 1: 9(-6.63,4.06) 10(-4.09,4.06) 11(4.09,4.06) 12(6.63,4.06)
  rect 1.608x1.608 hole 0.9: P1(-4.445,-6.35)
  round 1.608 hole 0.9: P2(-3.175,-8.89) P3(-1.905,-6.35) P4(-0.635,-8.89) P5(0.635,-6.35) P6(1.905,-8.89) P7(3.175,-6.35) P8(4.445,-8.89)
  round 3 hole 1.6: S1(-7.815,-3.05) S2(7.815,-3.05)
  round 3.25 hole 3.25 unplated: ""(-5.715,0) ""(5.715,0)
  silkscreen extent -8.62,-10.38 7.94,10.89, body extent -8.34,-10.34 8.34,10.92, height 11.74
"Schottky Diode SOT23 BAT54C" [mm] "Schottky Diode SOT23 BAT54C"
  rrect25% 1.12x0.6 smd: 1(-1.075,-0.915) 2(-1.075,0.915) 3(1.075,0)
  silkscreen extent -2.35,-1.45 0.65,1.45, body extent -1.2,-1.45 1.2,1.45
"ScrewHole_3.75mmD - duplicate" [mm] "SCREW HEAD DIA 4.5MM, SREW LEG DIA 3 MM"
  round 3.75 hole 3.75 unplated: 1(0,0)
  silkscreen extent -2.3,-2.3 2.3,2.3
"STM32F401RE Cortex-M4" [mm] "ARMÂ® CortexÂ®-M4 STM32F4 Microcontroller IC 32-Bit Single-Core 84MHz 512KB (512K x 8) FLASH 64-LQFP (10x10)"
  rect 1.5x0.3 smd: 1(-5.67,-3.75) 2(-5.67,-3.25) 3(-5.67,-2.75) 4(-5.67,-2.25) 5(-5.67,-1.75) 6(-5.67,-1.25) 7(-5.67,-0.75) 8(-5.67,-0.25) 9(-5.67,0.25) 10(-5.67,0.75) 11(-5.67,1.25) 12(-5.67,1.75) 13(-5.67,2.25) 14(-5.67,2.75) 15(-5.67,3.25) 16(-5.67,3.75) 33(5.67,3.75) 34(5.67,3.25) 35(5.67,2.75) 36(5.67,2.25) 37(5.67,1.75) 38(5.67,1.25) 39(5.67,0.75) 40(5.67,0.25) 41(5.67,-0.25) 42(5.67,-0.75) 43(5.67,-1.25) 44(5.67,-1.75) 45(5.67,-2.25) 46(5.67,-2.75) 47(5.67,-3.25) 48(5.67,-3.75)
  rect 0.3x1.5 smd: 17(-3.75,5.67) 18(-3.25,5.67) 19(-2.75,5.67) 20(-2.25,5.67) 21(-1.75,5.67) 22(-1.25,5.67) 23(-0.75,5.67) 24(-0.25,5.67) 25(0.25,5.67) 26(0.75,5.67) 27(1.25,5.67) 28(1.75,5.67) 29(2.25,5.67) 30(2.75,5.67) 31(3.25,5.67) 32(3.75,5.67) 49(3.75,-5.67) 50(3.25,-5.67) 51(2.75,-5.67) 52(2.25,-5.67) 53(1.75,-5.67) 54(1.25,-5.67) 55(0.75,-5.67) 56(0.25,-5.67) 57(-0.25,-5.67) 58(-0.75,-5.67) 59(-1.25,-5.67) 60(-1.75,-5.67) 61(-2.25,-5.67) 62(-2.75,-5.67) 63(-3.25,-5.67) 64(-3.75,-5.67)
  silkscreen extent -6.05,-5 5,5, body extent -6,-6 6,6
"TANT CAP 3528(B)" [mm] "10 ÂµF Molded Tantalum Polymer Capacitor 25 V 1411 (3528 Metric), 1210 150mOhm TCJB106M025R0150"
  rect 1.34x3.02 smd: 1(-1.54,0) 2(1.54,0)
  silkscreen extent -0.55,-1.5 0.55,1.5, body extent -1.75,-1.4 1.75,1.4
TPS54202DDCT [mm] "4.5V to 28V Input, 2A Output, EMI Friendly Synchronous Step-Down Converter SOT23-6"
  rrect25% 1.45x0.59 smd: 1(-1.155,-0.95) 2(-1.155,0) 3(-1.155,0.95) 4(1.155,0.95) 5(1.155,0) 6(1.155,-0.95)
  silkscreen extent -2.77,-1.57 0.8,1.57, body extent -1.4,-1.45 1.4,1.45
"TVS SMAJ6.0CA DO-214AC (SMA)" [mm] "SMAJ6.0CA WG Bidirectional TVS diode littlefuse DO-214AC (SMA)"
  rect 2.12x1.5 smd: 1(-2.115,0) 2(2.115,0)
  silkscreen extent -2.16,-1.28 2.16,1.28, body extent -2.57,-1.41 2.57,1.15, height 2.7
"W5500 LQFP-48" [mm] "W5500 LQFP-48 Hardwired TCP/IP embedded Ethernet controller QFP50P900X900X160-48N"
  rect 1.56x0.28 smd: 1(-4.18,-2.75) 2(-4.18,-2.25) 3(-4.18,-1.75) 4(-4.18,-1.25) 5(-4.18,-0.75) 6(-4.18,-0.25) 7(-4.18,0.25) 8(-4.18,0.75) 9(-4.18,1.25) 10(-4.18,1.75) 11(-4.18,2.25) 12(-4.18,2.75) 25(4.18,2.75) 26(4.18,2.25) 27(4.18,1.75) 28(4.18,1.25) 29(4.18,0.75) 30(4.18,0.25) 31(4.18,-0.25) 32(4.18,-0.75) 33(4.18,-1.25) 34(4.18,-1.75) 35(4.18,-2.25) 36(4.18,-2.75)
  rect 0.28x1.56 smd: 13(-2.75,4.18) 14(-2.25,4.18) 15(-1.75,4.18) 16(-1.25,4.18) 17(-0.75,4.18) 18(-0.25,4.18) 19(0.25,4.18) 20(0.75,4.18) 21(1.25,4.18) 22(1.75,4.18) 23(2.25,4.18) 24(2.75,4.18) 37(2.75,-4.18) 38(2.25,-4.18) 39(1.75,-4.18) 40(1.25,-4.18) 41(0.75,-4.18) 42(0.25,-4.18) 43(-0.25,-4.18) 44(-0.75,-4.18) 45(-1.25,-4.18) 46(-1.75,-4.18) 47(-2.25,-4.18) 48(-2.75,-4.18)
  silkscreen extent -5.55,-3.55 3.55,3.55, body extent -4.5,-4.5 4.5,4.5

## Part data
BT1: "Battery Holder (Open) Coin, 20.0mm 1 Cell SMD (SMT) Tab, CR2032, BS-7-RED", Package=None, Availability=Unavailable, MP=BS-7-RED, Price=None
C1 C2 C4 C5 C6 C7 C8 C9 C10 C11 C12 C13 C14 C15 C16 C17 C19 C20 C21 C22 C23 C24 C25 C26 C27 C28 C29 C30 C31 C32 C34 C35 C36 C37 C38 C39 C40 C41 C42 C43 C44 C45 C46 C47 C48 C49 C50 C52: library part "CAP CER 0.1uF/50V 5%", "CAP CER 0.1uF/50V  Ceramic Capacitor X7R 0805 (2012 Metric) SMT", Package="0805 Samsung", Check_prices=https://www.snapeda.com/parts/CL21B104KCFNNNE/Samsung+Electro-Mechanics/view-part/?ref=eda, Digi-Key_Part_Number=1276-6840-2-ND, MF=Samsung, MP=CL21B104KCFNNNE, Purchase-URL=https://pricing.snapeda.com/search?q=CL21B104KCFNNNE&ref=eda, SnapEDA_Link=https://www.snapeda.com/parts/CL21B104KCFNNNE/Samsung+Electro-Mechanics/view-part/?ref=snap
C3 C51: "10 ÂµF Molded Tantalum Polymer Capacitor 25 V 1411 (3528 Metric), 1210 150mOhm TCJB106M025R0150", Package="1210 AVX", Check_prices=https://www.snapeda.com/parts/TCJB106M025R0150/AVX/view-part/?ref=eda, MF=AVX, MP=TCJB106M025R0150, SnapEDA_Link=https://www.snapeda.com/parts/TCJB106M025R0150/AVX/view-part/?ref=snap
C18: "Ceramic capacitor 3300pF4KV, Tension nominale 400Vac(r.m.s.), 4KV ESD, DE2E3SA332MA3BY02F", Package=NONSTANDARD, Availability=Bad, Check_prices=https://www.snapeda.com/parts/DE2E3SA332MA3BY02F/Murata/view-part/2799752/?ref=eda, MF=Murata, MP=DE2E3SA332MA3BY02F, Price=None, Purchase-URL=https://pricing.snapeda.com/search/part/DE2E3SA332MA3BY02F/?ref=eda, SnapEDA_Link=https://www.snapeda.com/parts/DE2E3SA332MA3BY02F/Murata/view-part/2799752/?ref=snap
C33: "1000 pF Â±10% 2000V (2kV) Ceramic Capacitor X7R 1206 (3216 Metric) C1206C102KGRACAUTO", Package="3216 KEMET", Check_prices=https://www.snapeda.com/parts/C1206C102KGRACAUTO/KEMET/view-part/?ref=eda, MF=KEMET, MP=C1206C102KGRACAUTO, SnapEDA_Link=https://www.snapeda.com/parts/C1206C102KGRACAUTO/KEMET/view-part/?ref=snap
C53 C54: "10µF 25V Aluminum Electrolytic Capacitors Radial Lead Type TH, Dia-5mm, Pitch-2mm ECEA1EN100UI", Package="RADIAL-2 Panasonic", Check_prices=https://www.snapeda.com/parts/ECEA1EN100UI/Panasonic/view-part/5788532/?ref=eda, Digi-Key_Part_Number=ECE-A1EN100UI-ND, MF=Panasonic, MP=ECEA1EN100UI, Purchase-URL=https://pricing.snapeda.com/search/part/ECEA1EN100UI/?ref=eda, SnapEDA_Link=https://www.snapeda.com/parts/ECEA1EN100UI/Panasonic/view-part/5788532/?ref=snap
C55: library part "CAP CER 0.1uF/50V 5%", "CAP CER 0.1uF/50V  Ceramic Capacitor X7R 0805 (2012 Metric)", Package="0805 Samsung", Check_prices=https://www.snapeda.com/parts/CL21B104KCFNNNE/Samsung+Electro-Mechanics/view-part/?ref=eda, Digi-Key_Part_Number=1276-6840-2-ND, MF=Samsung, MP=CL21B104KCFNNNE, Purchase-URL=https://pricing.snapeda.com/search?q=CL21B104KCFNNNE&ref=eda, SnapEDA_Link=https://www.snapeda.com/parts/CL21B104KCFNNNE/Samsung+Electro-Mechanics/view-part/?ref=snap
D1: library part "Schottky Diode SOT23 BAT54C", "Schottky Diode 2x ComCath 0.2A 30V SOT23", Package="SOT-23 Diodes Inc.", Check_prices=https://www.snapeda.com/parts/BAT54C-7-F/Diodes+Inc./view-part/?ref=eda, MF="Diodes Inc.", MP=BAT54C-7-F, SnapEDA_Link=https://www.snapeda.com/parts/BAT54C-7-F/Diodes+Inc./view-part/?ref=snap
D2 D5 D6 D8 D9 D10 D11 D12 D17 D18: "Red 640nm LED Indication - Discrete 1.85V 0805 (2012 Metric) APT2012SRCPRV", Package="0805 Kingbright", Check_prices=https://www.snapeda.com/parts/APT2012SRCPRV/Kingbright/view-part/?ref=eda, MF=Kingbright, MP=APT2012SRCPRV, SnapEDA_Link=https://www.snapeda.com/parts/APT2012SRCPRV/Kingbright/view-part/?ref=snap
D3 D4 D7: "M7 General Purpose SMD Rectifier Diode SMA (DO-214AC) 1A 1000V 1n4007 RS2MA", Package="DO-214AC-2 Taiwan Semiconductor", Check_prices=https://www.snapeda.com/parts/RS2MA/Taiwan+Semiconductor/view-part/?ref=eda, MF="Taiwan Semiconductor", MP=RS2MA, SnapEDA_Link=https://www.snapeda.com/parts/RS2MA/Taiwan+Semiconductor/view-part/?ref=snap
D13 D14 D15: library part "TVS SMAJ6.0CA DO-214AC (SMA)", "SMAJ6.0CA WG Bidirectional TVS diode littlefuse DO-214AC (SMA)", Package=None, Availability=Unavailable, MP=SMAJ7.5CA, Price=None
D16: "DIODE-1N4148W-SOD-80 is a general-purpose silicon diode LL4148_L1G", Package=None, Availability=Unavailable, MP=LL4148_L1G, Price=None
F1 F2: "Polymeric PTC Resettable Fuse 60V 100 mA Ih Surface Mount 1812 (4532 Metric), Concave, MF-MSMF010-2", Package="1812 Bourns", Availability="In Stock", Check_prices=https://www.snapeda.com/parts/MF-MSMF010-2/Bourns/view-part/?ref=eda, MF=Bourns, MP=MF-MSMF010-2, Price=None, Purchase-URL=https://pricing.snapeda.com/search/part/MF-MSMF010-2/?ref=eda, SnapEDA_Link=https://www.snapeda.com/parts/MF-MSMF010-2/Bourns/view-part/?ref=snap
FB1: "MH2029-101Y-Bourns Inc.-Ferrite Bead, 100 Ohms @ 100 MHz , Signal Line Ferrite Bead 0805 (2012 Metric) 2A 100mOhm", Package=None, Availability=Unavailable, MP=MPZ2012S102AT000, Price=None
H1 H2 H3 H4: "SCREW HEAD DIA 4.5MM, SREW LEG DIA 3 MM"
J1 J3 J11: "3 Pin Terminal Block HDR 5MM THT RA 231-433_001-000", Package=None, Availability=Unavailable, MF=WAGO, MP=231-433/001-000, Price=None, SnapEDA_Link=https://www.snapeda.com/parts/231-433/001-000/WAGO/view-part/482062/?ref=snap
J2 J6 J8: "Conn Unshrouded Header HDR 4 POS 2.54mm Solder ST Top Entry Thru-Hole Bulk TSW-104-17-G-S-LL", Package=None, Check_prices=https://www.snapeda.com/parts/TSW-104-23-H-S-LL/Samtec/view-part/?ref=eda, MF=Samtec, MP=TSW-104-23-H-S-LL, SnapEDA_Link=https://www.snapeda.com/parts/TSW-104-23-H-S-LL/Samtec/view-part/?ref=snap
J4 J7: "3_pin burge 2.54mm", Package=None, Availability=Unavailable, MP=68001-403HLF, Price=None
J5: "BergStik, Board to Board connector, Unshrouded Vertical Header, Through Hole, Single Row, 6 Positions, 2.54 mm (0.100in) Pitch. 68604-406HLF", Package=None, Check_prices=https://www.snapeda.com/parts/68604-406HLF/Amphenol/view-part/?ref=eda, MF="AMPHENOL ICC / FCI", MP=68604-406HLF, SnapEDA_Link=https://www.snapeda.com/parts/68604-406HLF/Amphenol/view-part/?ref=snap
J9: "10/100 BaseT, 8P8C, Horizontal, Shielded, LED, Through Hole, 6 Âµin Plating, RJ45 with Integrated Magnetics Modular Connector CRJ011-ML1-TH", Package=None, Check_prices=https://www.snapeda.com/parts/CRJ011-ML1-TH/Same+Sky/view-part/?ref=eda, MF="Same Sky", MP=CRJ011-ML1-TH, SnapEDA_Link=https://www.snapeda.com/parts/CRJ011-ML1-TH/Same+Sky/view-part/?ref=snap
J12: "2 Pin Terminal Block HDR 5MM THT RA _OQ0271510000G", Package=None, Check_prices=https://www.snapeda.com/parts/OQ0271510000G/Amphenol/view-part/?ref=eda, MF="Amphenol Anytek", MP=OQ0271510000G, SnapEDA_Link=https://www.snapeda.com/parts/OQ0271510000G/Amphenol/view-part/?ref=snap
K1 K2: "Relays General Purpose Non Latching 3VDC SPDT 10A (250VAC) Max 5PIN SRD-03VDC-SL-C", Package="NON STANDARD-5 Songle Relay", Check_prices=https://www.snapeda.com/parts/SRD-03VDC-SL-C/Songle+Relay/view-part/?ref=eda, MF="Songle Relay", MP=SRD-03VDC-SL-C, SnapEDA_Link=https://www.snapeda.com/parts/SRD-03VDC-SL-C/Songle+Relay/view-part/?ref=snap
L1: "SWPA8040S120MT SMD 8.0×8.0x4.0mm 8040S 12uH Â±20% 2.8A 142 mOhm SMT Shielded Wirewound Inductor", Package="Nonstandard Abracon LLC", Availability="In Stock", Check_prices=https://www.snapeda.com/parts/ASPI-8040S-510M-T/Abracon+LLC/view-part/?ref=eda, MF="Abracon LLC", MP=ASPI-8040S-510M-T, Price=None, Purchase-URL=https://pricing.snapeda.com/search/part/ASPI-8040S-510M-T/?ref=eda, SnapEDA_Link=https://www.snapeda.com/parts/ASPI-8040S-510M-T/Abracon+LLC/view-part/?ref=snap
PS1: library part RFM-0505S, "DC-DC Converter/Isolator, SIP4, 1kV unreg, Single Output, 1W, 5V Out, RFM Series", Package="SIP-4 Recom Power", Check_prices=https://www.snapeda.com/parts/RFM-0505S/Recom+Power/view-part/?ref=eda, MF="Recom Power", MP=RFM-0505S, SnapEDA_Link=https://www.snapeda.com/parts/RFM-0505S/Recom+Power/view-part/?ref=snap
Q1 Q2: "NPN SMT BC848C_RFG SOT-23, 30V, 0.1A, NPN Transistor", Package="SOT-23 Taiwan Semiconductor", Check_prices=https://www.snapeda.com/parts/BC848C%20RFG/Taiwan+Semiconductor/view-part/?ref=eda, MF="Taiwan Semiconductor", MP="BC848C RFG", SnapEDA_Link=https://www.snapeda.com/parts/BC848C%20RFG/Taiwan+Semiconductor/view-part/?ref=snap
R1 R2 R3 R4 R5 R7 R8 R9 R10 R11 R12 R15 R16 R17 R18 R19 R20 R21 R22 R23 R28 R29 R30 R31 R33 R36 R37 R38 R42 R43 R47 R48 R49 R50 R51 R52 R54 R55 R56 R57 R58 R59 R62 R63 R64 R65 R66 R67 R68: library part "RES 10K 0.25W 5% 0805", "RESISTOR, THICK FILM, 10K, 5%, 0805 0.25W SMT", Package="805-2 Panasonic", Availability="In Stock", Check_prices=https://www.snapeda.com/parts/ERJ-6GEYJ103V/Panasonic+Electronic+Components/view-part/?ref=eda, MF="Panasonic Electronic", MP=ERJ-6GEYJ103V, Price=None, Purchase-URL=https://pricing.snapeda.com/search/part/ERJ-6GEYJ103V/?ref=eda, SnapEDA_Link=https://www.snapeda.com/parts/ERJ-6GEYJ103V/Panasonic+Electronic+Components/view-part/?ref=snap
R6 R13 R14 R24 R25 R26 R32 R34 R35 R39 R40 R41 R44 R45 R46 R53 R60 R61: "RESISTOR, THICK FILM, 10K, 5%, 0805 0.25W SMT", Package="805-2 Panasonic", Availability="In Stock", Check_prices=https://www.snapeda.com/parts/ERJ-6GEYJ103V/Panasonic+Electronic+Components/view-part/?ref=eda, MF="Panasonic Electronic", MP=ERJ-6GEYJ103V, Price=None, Purchase-URL=https://pricing.snapeda.com/search/part/ERJ-6GEYJ103V/?ref=eda, SnapEDA_Link=https://www.snapeda.com/parts/ERJ-6GEYJ103V/Panasonic+Electronic+Components/view-part/?ref=snap
R27: library part "RES 10K 0.25W 5% 0805", "RESISTOR, THICK FILM, 1M, 5%, 0805 0.25W SMT", Package="805-2 Panasonic", Availability="In Stock", Check_prices=https://www.snapeda.com/parts/ERJ-6GEYJ103V/Panasonic+Electronic+Components/view-part/?ref=eda, MF="Panasonic Electronic", MP=ERJ-6GEYJ103V, Price=None, Purchase-URL=https://pricing.snapeda.com/search/part/ERJ-6GEYJ103V/?ref=eda, SnapEDA_Link=https://www.snapeda.com/parts/ERJ-6GEYJ103V/Panasonic+Electronic+Components/view-part/?ref=snap
S2: "6.1 x 3.7 mm, 2.5 mm Actuator Height, 260 gf, Red, Surface Mount, SPST, Tactile Switch, TS09-63-25-R-260-SMT-TR", Package=None, Check_prices=https://www.snapeda.com/parts/TS09-63-25-R-260-SMT-TR/Same+Sky/view-part/?ref=eda, MF="Same Sky", MP=TS09-63-25-R-260-SMT-TR, SnapEDA_Link=https://www.snapeda.com/parts/TS09-63-25-R-260-SMT-TR/Same+Sky/view-part/?ref=snap
U1 U2 U4 U5: library part "Optclr EL817S1-FV", "Optoisoltr 5kv Transistor 4-Smd EL817S1-FV", Package=None, Availability=Unavailable, MF="{'manufacturer': u'Everlight Electronics Co Ltd'}", MP=EL817S1(A)(TU)-V, Price=None
U3: library part STM32F401RET6, "ARMÂ® CortexÂ®-M4 STM32F4 Microcontroller IC 32-Bit Single-Core 84MHz 512KB (512K x 8) FLASH 64-LQFP (10x10)", Package="LQFP-64 STMicroelectronics", Check_prices=https://www.snapeda.com/parts/STM32F401RET6/STMicroelectronics/view-part/?ref=eda, MF=STMicroelectronics, MP=STM32F401RET6, SnapEDA_Link=https://www.snapeda.com/parts/STM32F401RET6/STMicroelectronics/view-part/?ref=snap
U6: library part W5500, "W5500 LQFP-48 Hardwired TCP/IP embedded Ethernet controller", Package=None, Availability=Unavailable, MP=W5500, Price=None
U7: library part 74HC14D,653, "Inverter IC 6 Channel Schmitt Trigger 14-SO/SOIC-14", Package="SO14-14 Nexperia USA Inc.", Check_prices=https://www.snapeda.com/parts/74HC14D,653/Nexperia/view-part/?ref=eda, MF="Nexperia USA", MP=74HC14D,653, SnapEDA_Link=https://www.snapeda.com/parts/74HC14D,653/Nexperia/view-part/?ref=snap
U8: library part MAX485CSA, "MAX485CSA-RS-485/RS-422 Transceivers, SOIC-8", Package="SOIC-8 Maxim", Check_prices=https://www.snapeda.com/parts/MAX485CSA+/Analog+Devices/view-part/?ref=eda, MF="Analog Devices", MP=MAX485CSA+, SnapEDA_Link=https://www.snapeda.com/parts/MAX485CSA+/Analog+Devices/view-part/?ref=snap
U9: "EEPROM Memory IC 512Kb (64K x 8) IÂ²C 400 kHz 900 ns SOIC-8 AT24C512C-SSHM-T", Package="SO-8 Microchip", Check_prices=https://www.snapeda.com/parts/AT24C512C-SSHM-T/Microchip/view-part/?ref=eda, MF=Microchip, MP=AT24C512C-SSHM-T, SnapEDA_Link=https://www.snapeda.com/parts/AT24C512C-SSHM-T/Microchip/view-part/?ref=snap
U10: "4.5V to 28V Input, 2A Output, EMI Friendly Synchronous Step-Down Converter SOT23-6", Package="SOT-23-THN-6 Texas Instruments", Check_prices=https://www.snapeda.com/parts/TPS54202DDCT/Texas+Instruments/view-part/?ref=eda, MF="Texas Instruments", MP=TPS54202DDCT, SnapEDA_Link=https://www.snapeda.com/parts/TPS54202DDCT/Texas+Instruments/view-part/?ref=snap
VR1: "LM1117IMPX-3.3V 800-mA 15-V linear voltage regulator SOT-223", Package="SOT-223-4 Texas Instruments", Check_prices=https://www.snapeda.com/parts/LM1117IMPX-5.0/NOPB/Texas+Instruments/view-part/?ref=eda, MF="Texas Instruments", MP=LM1117IMPX-5.0/NOPB, SnapEDA_Link=https://www.snapeda.com/parts/LM1117IMPX-5.0/NOPB/Texas+Instruments/view-part/?ref=snap
Y1 Y2: library part "Crystal 16 Mhz SMD 2 pin_1", "16 MHz Â±30ppm Crystal 20pF 60 Ohms HC-49/US FOXSDLF/128-20 16 Mhz Crystal SMD –CSM-4ALX(28ALX) 12.5mmX4.85mmX4mm", Package="HC49SD Fox Electronics", Check_prices=https://www.snapeda.com/parts/FOXSDLF/128-20/Fox+Electronics/view-part/?ref=eda, MF="Fox Electronics", MP=FOXSDLF/128-20, SnapEDA_Link=https://www.snapeda.com/parts/FOXSDLF/128-20/Fox+Electronics/view-part/?ref=snap
Y3: "32.768 kHz Â±20ppm Crystal 6pF 50 kOhms 4-SOJ, 5.50mm pitch ABS25-32.768KHZ-6-T", Package="4-4 Abracon", Check_prices=https://www.snapeda.com/parts/ABS25-32.768KHZ-6-T/Abracon/view-part/?ref=eda, MF=Abracon, MP=ABS25-32.768KHZ-6-T, SnapEDA_Link=https://www.snapeda.com/parts/ABS25-32.768KHZ-6-T/Abracon/view-part/?ref=snap

## Via types
v1: diameter 0.65, hole 0.411, Top Layer to Bottom Layer, 98 vias
v2: diameter 0.85, hole 0.511, Top Layer to Bottom Layer, 73 vias
v3: diameter 0.4, hole 0.24, Top Layer to Bottom Layer, 23 vias
v4: diameter 0.5, hole 0.254, Top Layer to Bottom Layer, 5 vias
v5: diameter 0.65, hole 0.311, Top Layer to Bottom Layer, 4 vias
v6: diameter 0.5, hole 0.311, Top Layer to Bottom Layer, 4 vias
v7: diameter 0.75, hole 0.411, Top Layer to Bottom Layer, 2 vias
v8: diameter 0.4, hole 0.254, Top Layer to Bottom Layer, 2 vias

## Nets (pads, with @x,y where several pads share a name; then routed paths per layer and width w, separated by ;. In a path a pad name is that pad's centre, name@x,y a point inside that pad or via, vN(x,y) a via of type N, cw(c..) or ccw(c..) an arc to the next point about the centre after c; other vN are vias at no path point)
3V3: C1.2 C5.2 C6.2 C7.2 C8.2 C9.2 C10.2 C11.2 C16.2 C17.2 C39.2 C40.2 C41.2 C43.2 C51.1 C52.2 D1.1 FB1.1 J6.02 R1.2 R8.2 R9.2 R15.2 R16.1 R19.2 R20.1 R24.2 R25.2 R26.2 R32.2 R34.2 R35.2 R57.2 R64.2 U3.13 U3.19 U3.32 U3.48 U3.64 U6.28 U9.8 VR1.2 VR1.4 | length 441.6
  Top Layer w0.154: C8.2@40.132,79.237 C8.2@40.397,79.502 ; C8.2@40.132,79.364 C8.2@40.31,79.542 ; v3(41.402,79.629) 41.449,79.582 42.465,79.582 42.797,79.25 42.797,77.889 42.87,77.816 U3.48@43.301,77.816 ; C5.2@43.076,64.03 44.323,62.783 44.323,60.706 44.577,60.452 46.736,60.452 47.117,60.833 47.117,62.611 47.625,63.119 51.17,63.119 C6.2@51.551,63.5 ; C6.2@51.54,63.5 51.54,65.648 51.721,65.829 U3.19@51.721,68.396
  Top Layer w0.254: U9.8@20.168,78.867 22.86,78.867 C43.2@23.114,79.121 23.368,78.867 25.178,78.867 R57.2@25.4,79.089 25.622,78.867 27.591,78.867 R8.2@27.813,79.089 ; C11.2@35.814,64.03 C5.2@42.926,64.03 43.076,64.03 43.307,64.261 43.307,66.482 44.839,68.014 45.198,68.014 45.221,68.037 U3.32@45.221,68.396 ; C8.2@40.397,79.502 40.397,79.454 40.572,79.629 v3(41.402,79.629) ; 42.037,99.949 43.053,98.933 J6.02@43.053,97.409 J6.02@43.053,96.901 ; v3(50.546,84.074) 51.943,84.074 52.705,83.312 52.705,79.753 U3.64@52.721,79.736 ; U3.19@51.721,68.396 51.721,70.644 52.893,71.816 U3.13@54.641,71.816 ; D1.1@60.478,57.218 62.817,57.218 C1.2@62.865,57.266 ; C17.2@78.729,64.11 C16.2@78.729,66.381 ; C16.2@78.743,66.396 78.994,66.646 78.994,75.692 81.122,77.82 U6.28@83.018,77.82 ; VR1.2@99.531,8.763 VR1.2@99.785,8.509 VR1.4@105.955,8.509
  Top Layer w0.54: R9.2@22.733,48.796 22.733,50.673 25.4,53.34 28.956,53.34 ; 34.417,80.264 34.417,98.552 35.814,99.949 42.037,99.949 66.929,99.949 67.437,99.441 C41.2@67.437,95.504 ; C11.2@35.814,64.019 34.581,64.019 33.903,63.341 29.305,63.341 27.813,61.849 ; C8.2@40.132,79.121 27.813,79.121 R8.2@27.813,79.089 27.813,61.849 ; R16.1@56.642,25.051 57.69,24.003 66.135,24.003 R19.2@67.183,25.051 R19.2@67.393,25.261 ; R16.1@56.642,25.4 56.642,25.465 56.326,25.781 52.564,25.781 52.248,25.465 52.248,25.388 R15.2@51.943,25.083 51.943,27.305 51.181,28.067 47.752,28.067 46.609,29.21 46.609,45.974 43.978,48.605 43.089,48.605 R1.2@42.926,48.768 42.926,50.673 40.259,53.34 28.956,53.34 ; C1.2@62.865,57.266 66.918,57.266 70.993,61.341 80.264,61.341 ; C41.2@67.437,95.261 C41.2@67.437,95.504 ; R19.2@67.52,25.388 71.261,25.388 71.388,25.261 71.577,25.261 R20.1@71.882,24.956 72.072,25.146 78.74,25.146 80.645,23.241 80.645,14.605 82.804,12.446 88.519,12.446 90.297,10.668 90.297,9.753 R64.2@90.522,9.528 ; v2(78.613,97.282) 78.613,97.198 78.511,97.097 R26.2@78.511,95.263 R25.2@76.479,95.263 R24.2@74.447,95.263 74.207,95.504 C41.2@67.437,95.504 ; C17.2@78.729,64.11 78.729,62.876 80.264,61.341 ; R64.2@90.297,9.528 R64.2@90.297,9.303 90.572,9.028 92.649,9.028 92.954,9.333 92.954,10.023 v2(94.234,11.303) ; v2(91.694,97.282) 91.707,97.269 91.707,95.371 R35.2@91.719,95.358 R34.2@93.751,95.358 R32.2@95.783,95.358 ; C52.2@92.588,9.033 C51.1@96.012,9.033 96.409,8.636 99.135,8.636 99.187,8.584 VR1.2@99.187,8.382 ; v2(94.234,59.563) 94.234,60.804 FB1.1@94.466,61.036 94.161,61.341 80.264,61.341 ; 27.813,61.849 27.813,54.483 28.956,53.34
  Bottom Layer w0.254: v3(41.402,79.629) 41.402,82.55 42.926,84.074 v3(50.546,84.074)
  Bottom Layer w0.54: v2(78.613,97.282) v2(91.694,97.282) ; v2(94.234,11.303) v2(94.234,59.563)
5VDC: C53.P C55.2 D3.C D7.C K1.COIL1 K2.COIL1 PS1.4 R2.2 R10.2 R65.1 R67.1 U1.4 U2.4 | length 169.4
  Top Layer w0.54: PS1.4@7.279,61.821 7.279,57.872 8.596,56.555 8.596,55.804 9.076,55.324 9.076,51.483 C53.P@9.251,51.308 ; C53.P@9.124,51.435 8.128,50.439 8.128,47.014 U2.4@7.85,46.736 ; C53.P@9.144,51.689 R10.2@12.161,51.689 ; K2.COIL1@10.256,33.432 10.033,33.655 10.033,39.707 D7.C@10.458,40.132 6.604,40.132 5.334,41.402 5.334,45.593 6.477,46.736 U2.4@7.85,46.736 ; v2(10.668,45.212) 9.144,46.736 U2.4@7.85,46.736 ; K1.COIL1@29.56,33.432 29.337,33.655 29.337,39.652 D3.C@29.817,40.132 ; D3.C@29.889,40.132 D3.C@29.817,40.132 ; v2(30.607,45.339) 29.369,46.577 28.329,46.577 U1.4@28.17,46.736 ; R2.2@32.48,51.943 28.956,51.943 28.17,51.157 U1.4@28.17,46.736 ; v2(53.848,8.636) R65.1@53.848,10.255 ; v2(68.834,8.636) R67.1@68.834,10.255 ; U1.4@28.17,46.736 27.965,46.531 26.973,46.531 26.289,45.847 26.289,41.021 27.178,40.132 D3.C@29.817,40.132
  Bottom Layer w0.54: v2(10.668,45.212) 30.261,45.212 30.328,45.28 30.548,45.28 v2(30.607,45.339) 46.863,45.339 48.387,43.815 48.387,9.779 49.53,8.636 v2(53.848,8.636) v2@68.691,8.636
12VCC: D4.A J12.2 R62.2 | length 9.2
  Top Layer w0.54: R62.2@114.046,22.162 114.808,22.924 D4.A@114.808,25.825 114.808,25.515 115.288,25.035 118.983,25.035 J12.2@119.38,24.638